# Altium PCB Copy of bms_sub (With Positions).PcbDoc
Units mm, origin at the board's own origin, x right, y up, seen from the top; angles counter-clockwise.
Board outline 161.78 x 65 mm, 2 copper layers (Top Layer, Bottom Layer); 9 components, 0 nets, 9 pads, 0 vias.
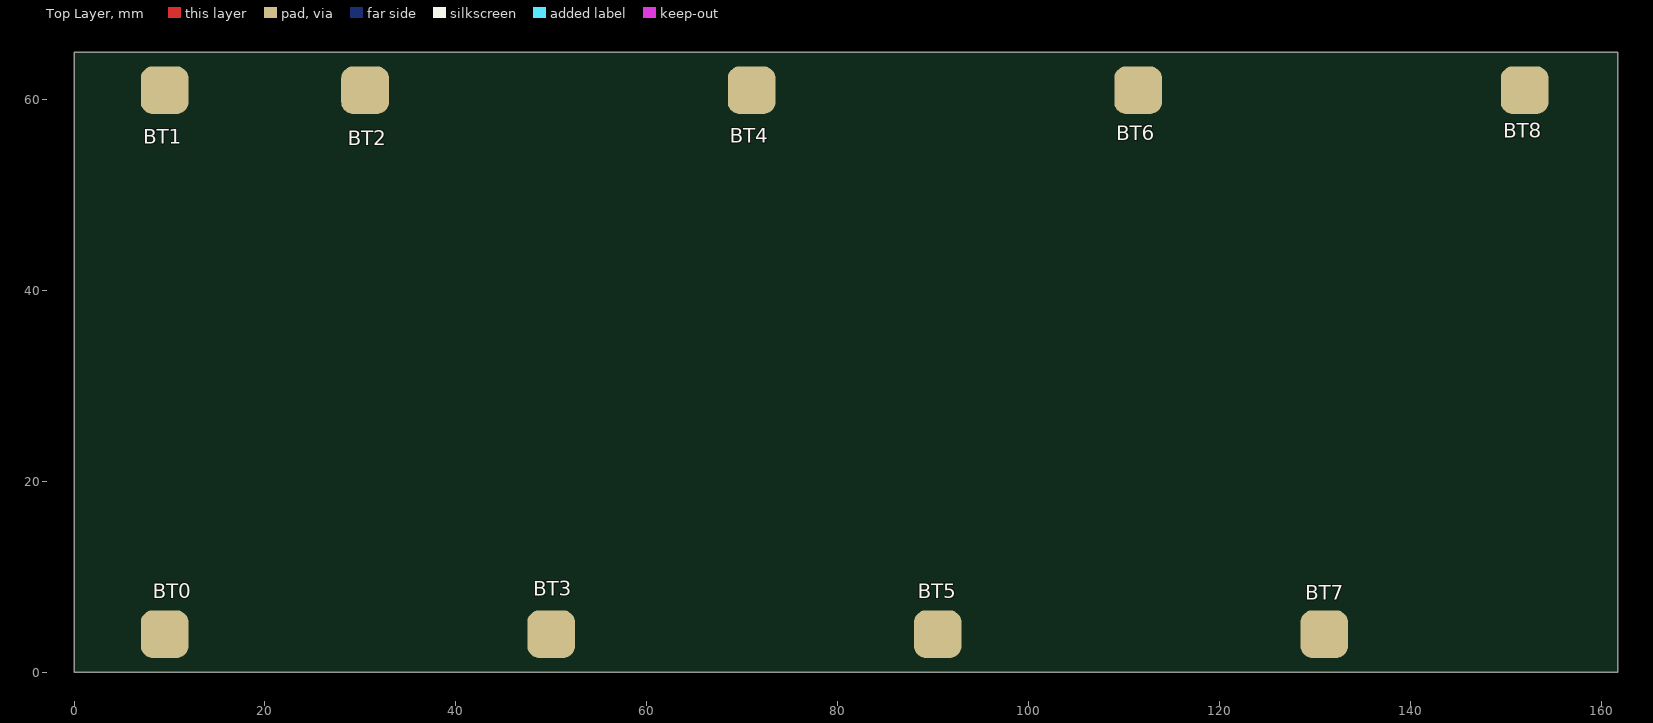
[diagram p0: Top Layer view]
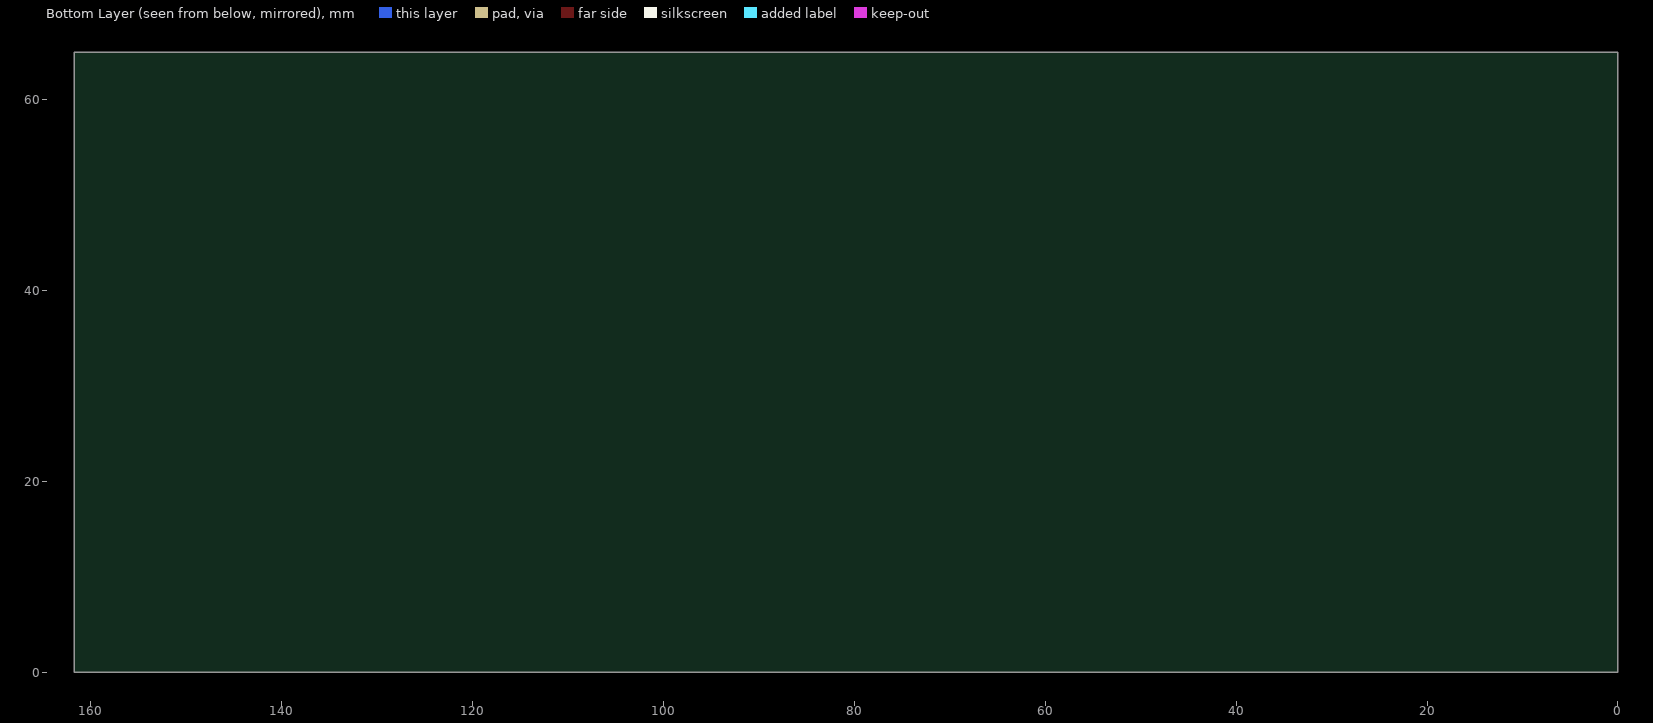
[diagram p1: Bottom Layer view, seen from below]

## Layer stack, top to bottom
Top Solder: solder mask 0.0102, Solder Resist, Dk 3.5
Top Layer: signal copper 0.0356
Dielectric 1: dielectric 0.32, FR-4, Dk 4.8
Bottom Layer: signal copper 0.0356
Bottom Solder: solder mask 0.0102, Solder Resist, Dk 3.5

## Board outline
0,0 161.78,0 161.78,65 0,65

## Design rules (kind name [scope] priority, off if disabled: settings)
Clearance [All] p1: gap=0.254 ignorepadtopadclearanceinfootprint=FALSE except(0: Arc-Hole Track-Hole SMDPad-Hole THPad-Hole Via-Hole Fill-Hole Poly-Hole Region-Hole Text-Hole)
PolygonConnect [All] p1: connectstyle=Relief reliefconductorwidth=0.254 reliefentries=4 polygonreliefangle="90 Angle" airgapwidth=0.254
RoutingVias [All] p1: holewidth=0.711 width=1.27 viastyle="Through Hole" minholewidth=0.711 minwidth=1.27 maxholewidth=0.711 maxwidth=1.27
SolderMaskExpansion [All] p1: expansion=0.102
Width [All] p1: maxlimit=0.254 minlimit=0.254 preferedwidth=0.254
30 further rules are at their usual default settings.

## Components (designator, comment, footprint, x,y, rotation, side; value= is the part's Value field where it differs from the comment)
BT0 "Comment" "Battery pad"#1 7.62,2.413 r0 top
BT1 "Comment" "Battery pad"#2 7.874,58.42 r0 top
BT2 "Comment" "Battery pad"#3 24.511,62.5 r0 top
BT3 "Comment" "Battery pad"#4 27.178,4 r0 top
BT4 "Comment" "Battery pad"#5 67.056,62.5 r0 top
BT5 "Comment" "Battery pad"#6 45.974,4 r0 top
BT6 "Comment" "Battery pad"#7 111.252,62.5 r0 top
BT7 "Comment" "Battery pad"#8 68.707,4 r0 top
BT8 "Comment" "Battery pad"#9 153.797,62.5 r0 top

## Footprints (in the part's own frame and the unit in brackets; to place one, negate y for a bottom-side part, rotate by r counter-clockwise, add the part's x,y. Pads: shape width x height; smd on the part's side, far side on the other; paste and mask are expansions set on the pad)
"Battery pad"#1 [mm]
  rrect50% 5x5 smd: 1(1.88,1.587)
"Battery pad"#2 [mm]
  rrect50% 5x5 smd: 1(1.626,2.58)
"Battery pad"#3 [mm]
  rrect50% 5x5 smd: 1(5.989,-1.5)
"Battery pad"#4 [mm]
  rrect50% 5x5 smd: 1(22.822,0)
"Battery pad"#5 [mm]
  rrect50% 5x5 smd: 1(3.944,-1.5)
"Battery pad"#6 [mm]
  rrect50% 5x5 smd: 1(44.526,0)
"Battery pad"#7 [mm]
  rrect50% 5x5 smd: 1(0.248,-1.5)
"Battery pad"#8 [mm]
  rrect50% 5x5 smd: 1(62.293,0)
"Battery pad"#9 [mm]
  rrect50% 5x5 smd: 1(-1.797,-1.5)

## Nets (pads, with @x,y where several pads share a name; then routed paths per layer and width w, separated by ;. In a path a pad name is that pad's centre, name@x,y a point inside that pad or via, vN(x,y) a via of type N, cw(c..) or ccw(c..) an arc to the next point about the centre after c; other vN are vias at no path point)
pads on no net: BT0.1 BT1.1 BT2.1 BT3.1 BT4.1 BT5.1 BT6.1 BT7.1 BT8.1

## Silkscreen, mask and mechanical layers (free items; w line width, h text height)
Mechanical 1:
  the board outline again, w0.254